# EAGLE board power_adc_module (EAGLE 9.5.2)
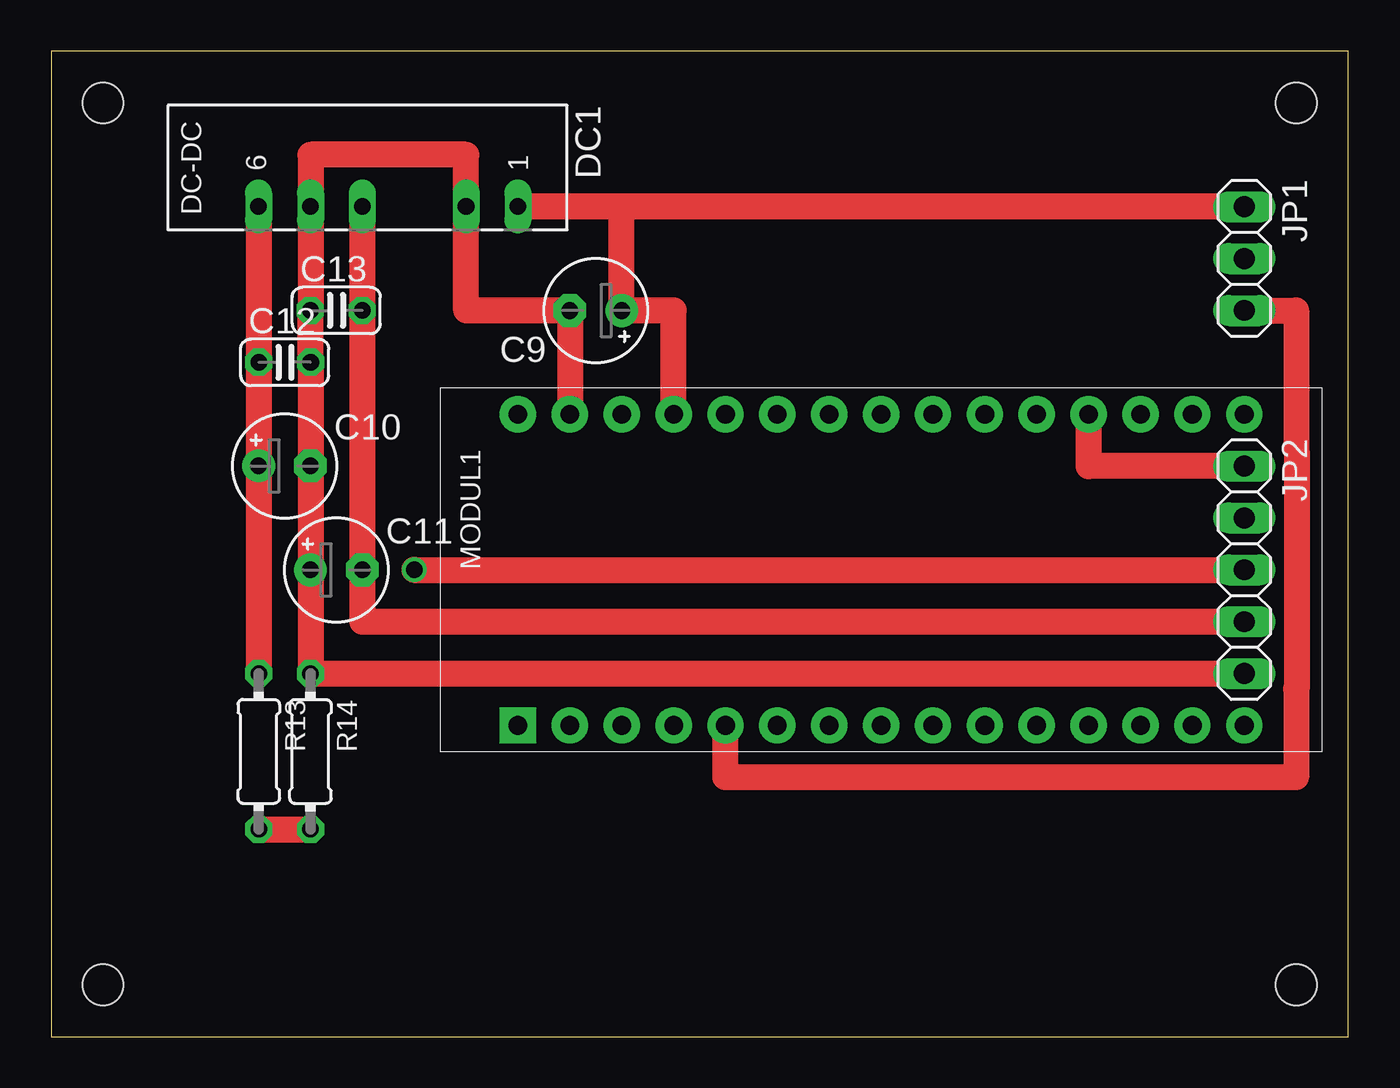
[diagram p0: board, top side]
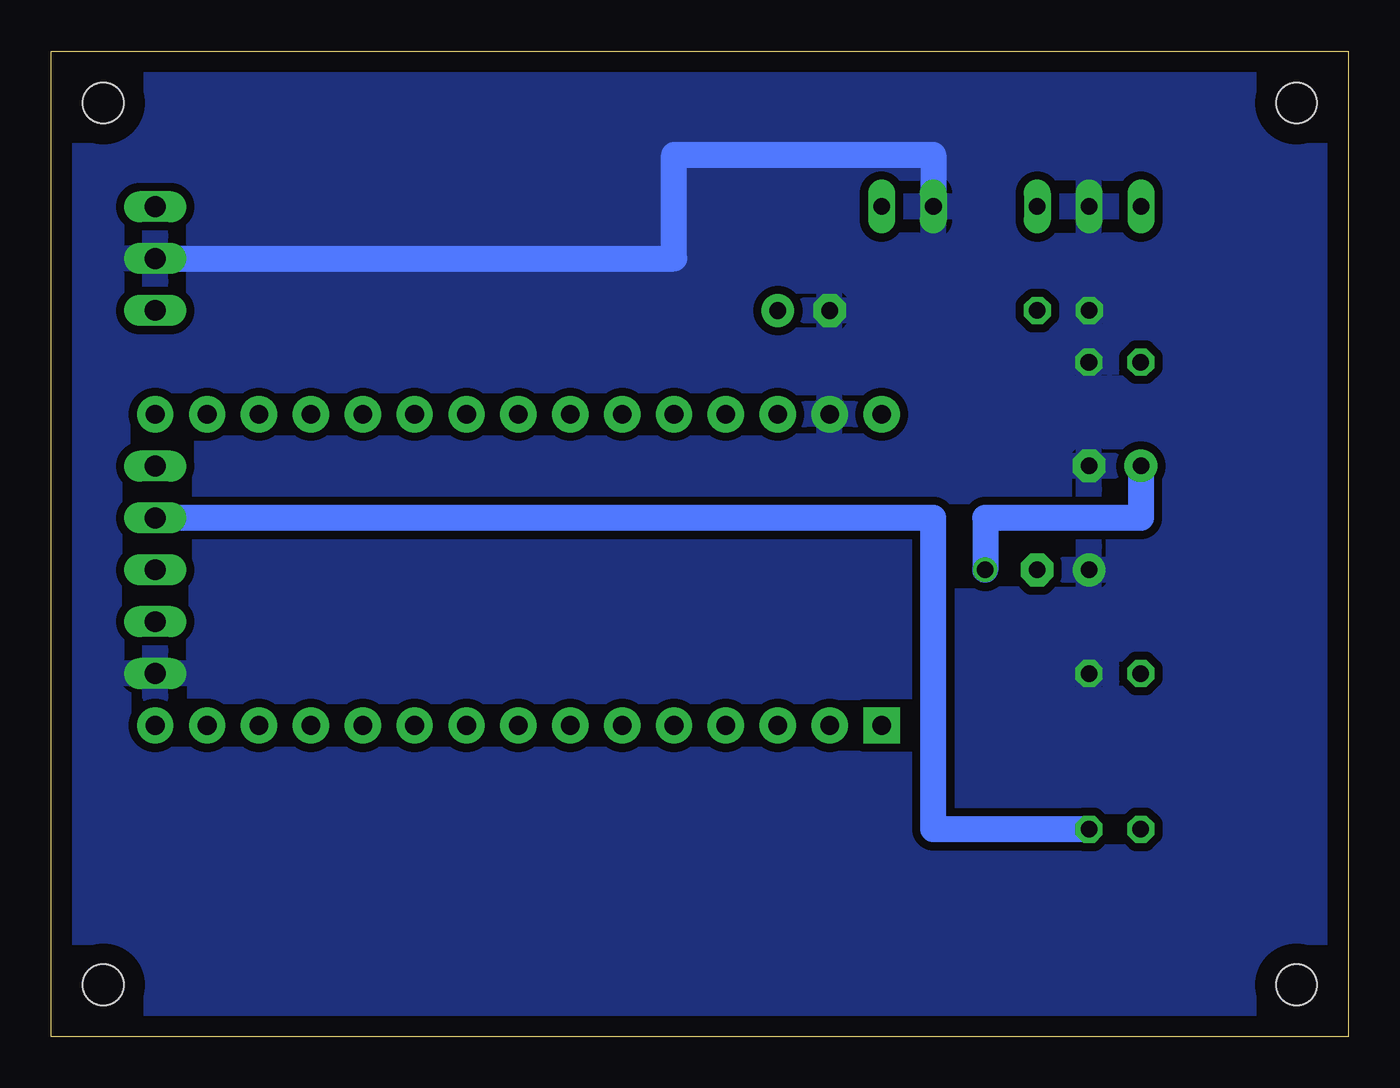
[diagram p1: board, bottom side, seen from below]

Size 63.52 x 48.26 mm. Coordinates in mm from the lower left corner, seen from the top.
Outline: 0,0 63.52,0 63.5,48.26 0,48.26 0,0
Copper layers (1*16): Top 0.035mm / dielectric 1.5mm / Bottom 0.035mm
Design rules "default *": minimum track width 6mil, minimum drill 0.35mm, track to track 0.4mm, track to pad 0.4mm, pad to pad 0.4mm, via to via 0.4mm, smd to smd 0.4mm, copper to edge 40mil, drill to drill 6mil, minimum pad ring 10mil, minimum via ring 8mil, stop-mask expansion 4mil, vias tented up to drill 0mil, thermal gap 10mil
Net classes: 0 default: width 1.27 mm, clearance 0.381 mm
Holes 2 mm at 2.54,45.72 2.54,2.54 60.96,45.72 60.96,2.54

## Footprints (pad centres in the part's own frame; a part is rotated, then mirrored left to right if it is on the bottom)
E2,5-5 = drill 0.813 pad 1.6: + -1.27,0 | drill 0.813 pad 1.6 octagon: - 1.27,0
C025-024X044 = drill 0.813 octagon: 1 -1.27,0; 2 1.27,0
NMA = drill 0.813 long: 1 0,6.35; 2 0,3.81; 4 0,-1.27; 5 0,-3.81; 6 0,-6.35
1X03 = drill 1.016 long: 1 -2.54,0; 2 0,0; 3 2.54,0
1X05 = drill 1.016 long: 1 -5.08,0; 2 -2.54,0; 3 0,0; 4 2.54,0; 5 5.08,0
ARDUINO_NANO2 = drill 0.914 pad 1.778 square: J1.1 -7.62,17.78 | drill 0.914 pad 1.778: J1.2 -7.62,15.24; J1.3 -7.62,12.7; J1.4 -7.62,10.16; J1.5 -7.62,7.62; J1.6 -7.62,5.08; J1.7 -7.62,2.54; J1.8 -7.62,0; J1.9 -7.62,-2.54; J1.10 -7.62,-5.08; J1.11 -7.62,-7.62; J1.12 -7.62,-10.16; J1.13 -7.62,-12.7; J1.14 -7.62,-15.24; J1.15 -7.62,-17.78; J2.1 7.62,17.78; J2.2 7.62,15.24; J2.3 7.62,12.7; J2.4 7.62,10.16; J2.5 7.62,7.62; J2.6 7.62,5.08; J2.7 7.62,2.54; J2.8 7.62,0; J2.9 7.62,-2.54; J2.10 7.62,-5.08; J2.11 7.62,-7.62; J2.12 7.62,-10.16; J2.13 7.62,-12.7; J2.14 7.62,-15.24; J2.15 7.62,-17.78
0204/7 = drill 0.813 octagon: 1 -3.81,0; 2 3.81,0

## Placement (x,y rotation side)
C9  47u  [E2,5-5]  26.67,35.55 180 top
C10  47u  [E2,5-5]  11.43,27.95 0 top
C11  47u  [E2,5-5]  13.97,22.85 0 top
C12  0.1u  [C025-024X044]  11.44,33.02 0 top
C13  0.1u  [C025-024X044]  13.96,35.56 0 top
DC1  IN 5v / OUT ±5v  [NMA]  16.51,40.65 270 top
JP1  [1X03]  58.42,38.1 270 top
JP2  [1X05]  58.42,22.86 270 top
MODUL1  ARDUINO_NANO2  [ARDUINO_NANO2]  40.64,22.86 90 top
R13  4.6k  [0204/7]  10.17,13.97 270 top
R14  4.6k  [0204/7]  12.7,13.96 270 top

## Library data of the parts
C9-C13 = rcl; SPICEPREFIX: C
DC1 = dc-dc-converter; MF: C & D TECHNOLOGIES, INC; MPN: NMA0515SC; OC_FARNELL: 1021434; OC_NEWARK: 61K3064
JP1 JP2 = pinhead
MODUL1 = arduino; ANZAHL: 2; MODUL: TRUE; STECKX0: -76200; STECKX1: 76200; STECKY0: 177800; STECKY1: 177800
R13 R14 = rcl; SPICEPREFIX: R

## Nets
3V3: MODUL1.J2.14
+5V: C10.+ C12.1 DC1.6 JP2.3 R13.1
-5V: C11.- C13.2 DC1.4 JP2.4
AREF: MODUL1.J2.13
COM: MODUL1.J1.4
GND: C9.- C10.- C11.+ C12.2 C13.1 DC1.2 DC1.5 JP1.2 JP2.5 MODUL1.J2.2 R14.1
IN5V: C9.+ DC1.1 JP1.1 MODUL1.J2.4
N$1: JP2.1 MODUL1.J2.12
N$3: JP1.3 MODUL1.J1.5
VCC: JP2.2 R13.2 R14.2
VIN: MODUL1.J2.1

## Tracks (layer width: path | path; a pad name or v marks a point on that pad's centre or on a via)
+5V  (via drill 0.8)
  Top 1.27: C10.+ | C10.+ R13.1 | DC1.6 C12.1 C10.+ | v17.78,22.86 JP2.3
  Bottom 1.27: C10.+ 10.16,25.4 17.78,25.4 v17.78,22.86
-5V
  Top 1.27: JP2.4 15.24,20.32 C11.- C13.2 DC1.4
GND
  Top 1.27: MODUL1.J2.2 C9.- 20.33,35.55 20.32,35.56 DC1.2 20.32,43.18 12.7,43.18 DC1.5 C13.1 | C13.1 | C13.1 C12.2 C10.- C11.+ R14.1 JP2.5
  Bottom 1.27: JP1.2 33.02,38.1 33.02,43.18 20.32,43.18 DC1.2
  pour Bottom: -2.54,50.8 63.5,50.8 66.04,50.8 66.04,-2.54 -2.54,-2.54
IN5V
  Top 1.27: MODUL1.J2.4 30.48,35.56 C9.+ 27.94,40.64 | 27.94,40.64 27.93,40.65 DC1.1 | JP1.1 27.94,40.64
N$1
  Top 1.27: JP2.1 50.8,27.94 MODUL1.J2.12
N$3
  Top 1.27: JP1.3 60.96,35.56 60.96,28.7 60.98,28.68 60.98,17.04 60.96,17.02 60.96,12.7 33.02,12.7 MODUL1.J1.5
VCC
  Top 1.27: R13.2 R14.2
  Bottom 1.27: R14.2 20.32,10.16 20.32,25.4 JP2.2